# EAGLE board Nixie clock (EAGLE 9.4.2)
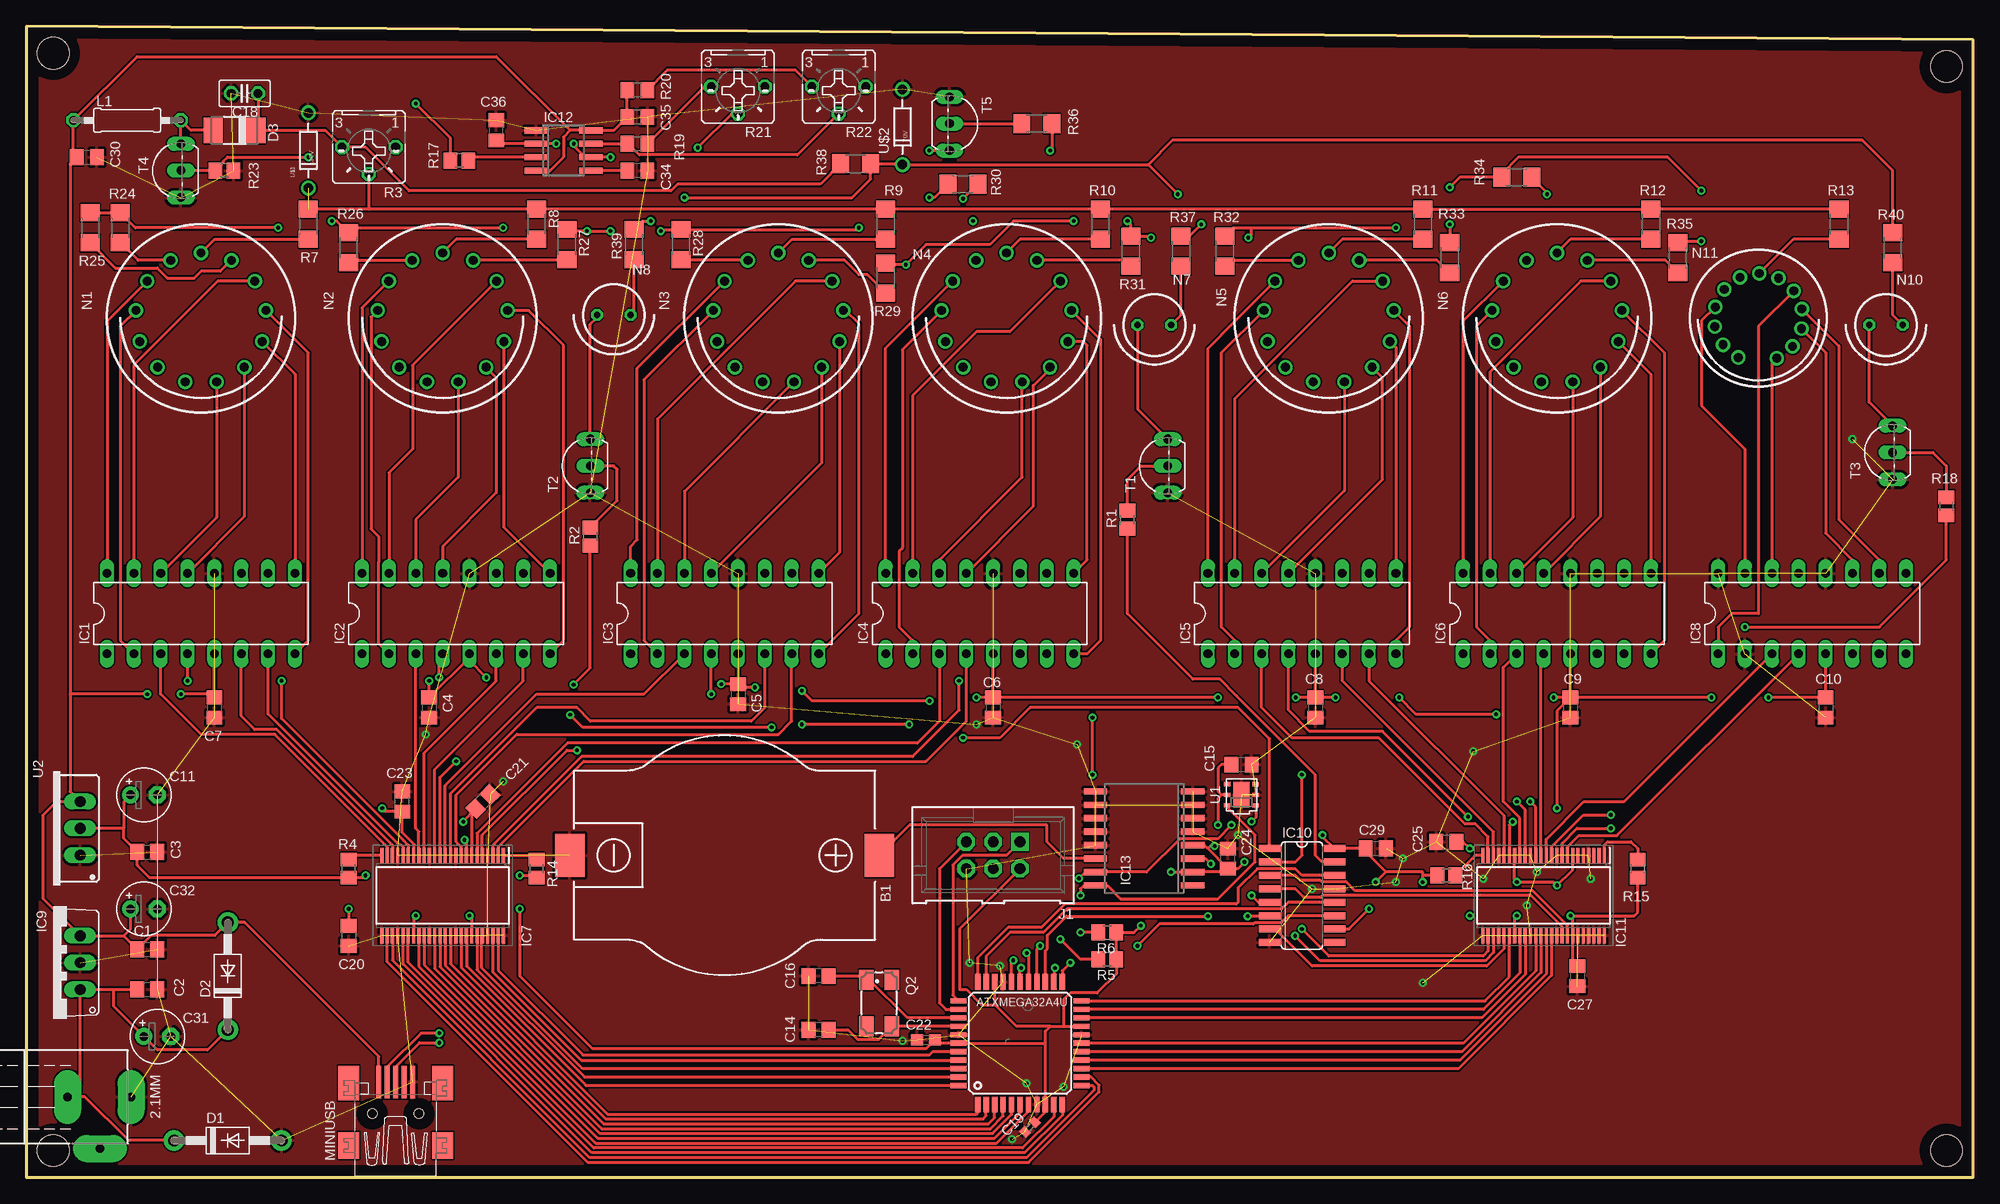
[diagram p0: board, top side]
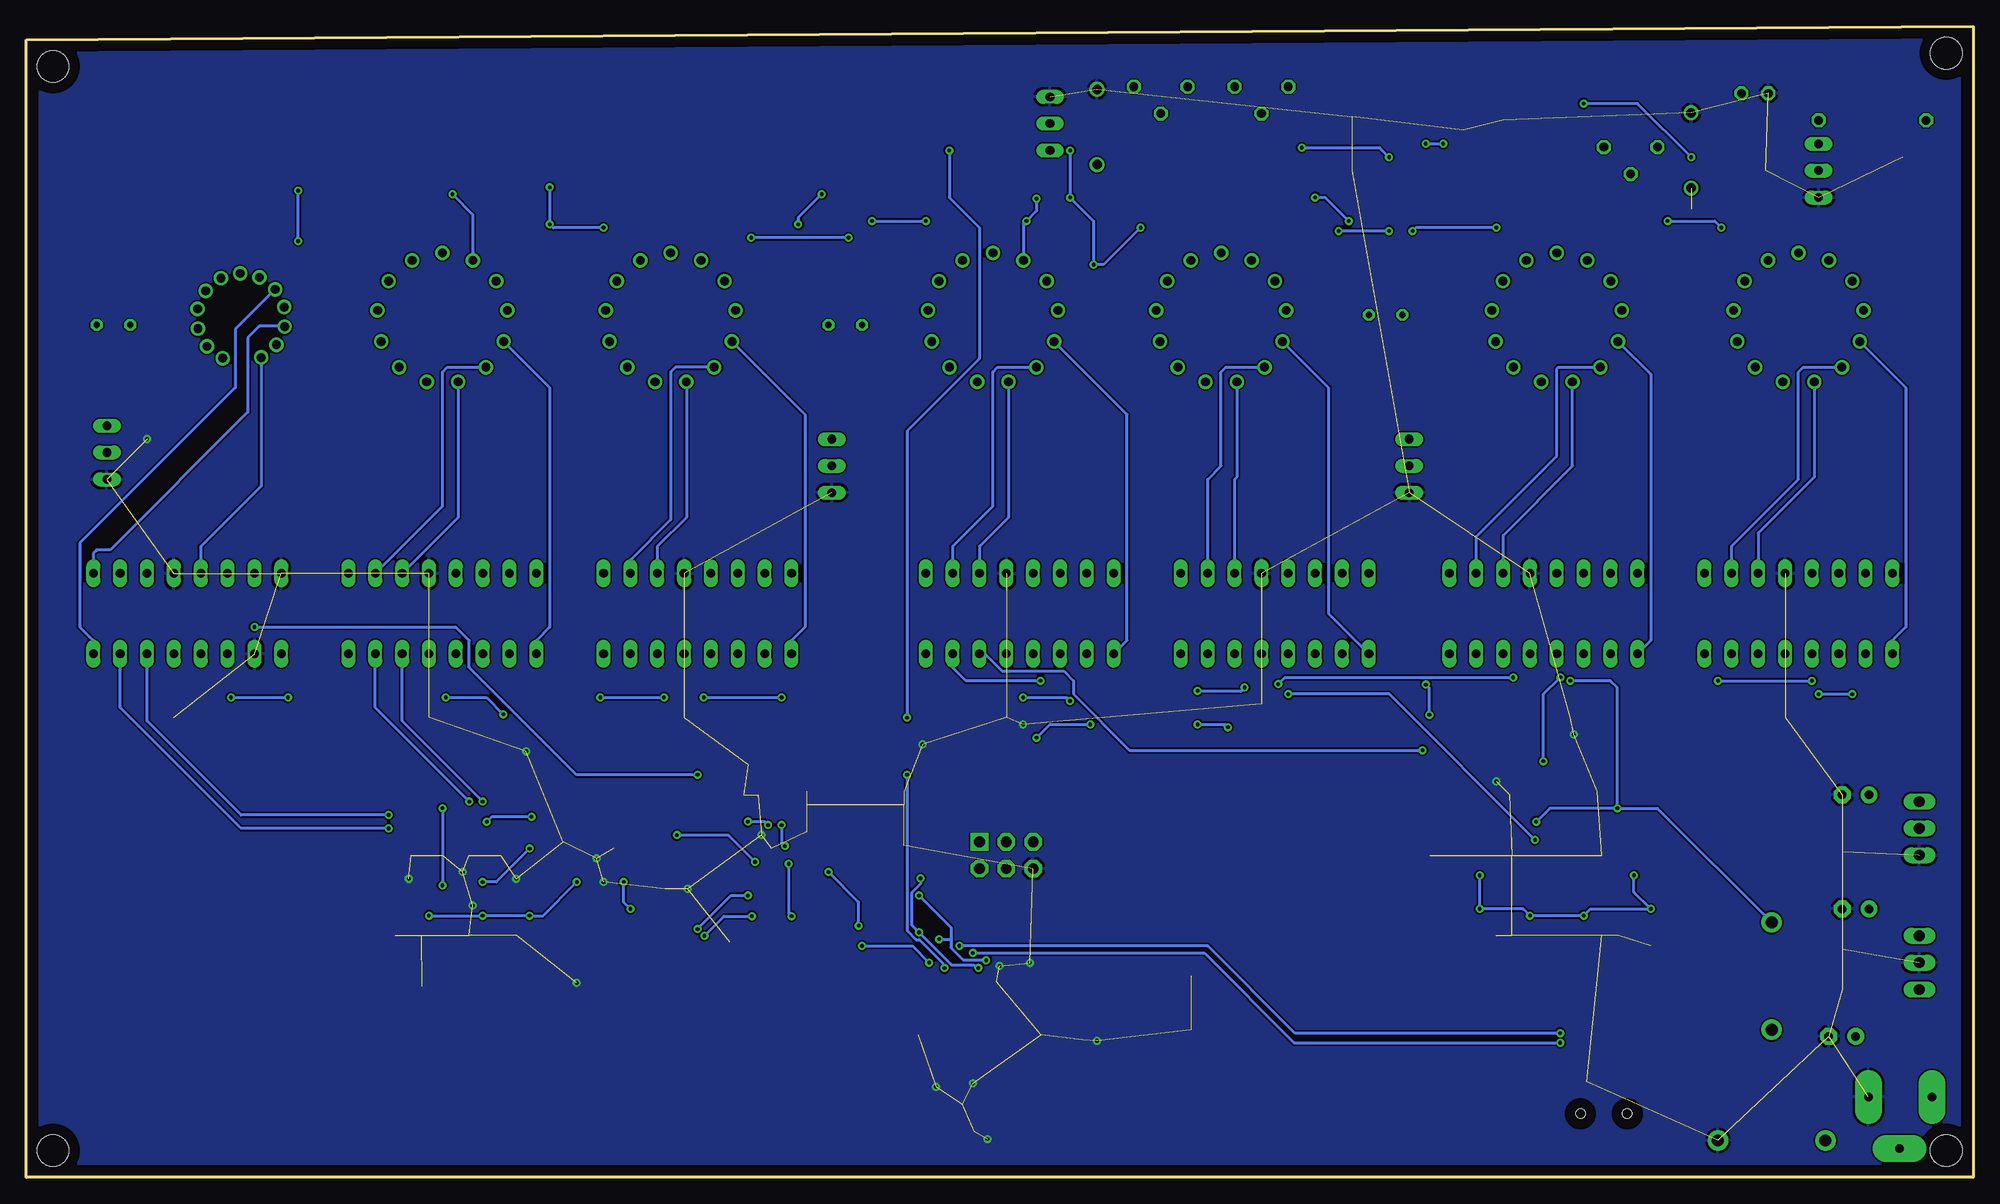
[diagram p1: board, bottom side, seen from below]

Size 184.13 x 108.89 mm. Coordinates in mm from the lower left corner, seen from the top.
Outline: 0,0 184.13,0 184.13,107.62 0,108.89 0,0
Copper layers (1*16): Top 0.035mm / dielectric 1.5mm / Bottom 0.035mm
Design rules "default": minimum track width 6mil, minimum drill 0.35mm, track to track 6mil, track to pad 6mil, pad to pad 6mil, via to via 6mil, smd to smd 6mil, copper to edge 40mil, drill to drill 6mil, minimum pad ring 10mil, minimum via ring 8mil, stop-mask expansion 4mil, vias tented up to drill 0mil, thermal gap 10mil
Holes 3 mm at 2.54,106.36 181.61,105.09 181.61,2.54 2.54,2.54

## Footprints (pad centres in the part's own frame; a part is rotated, then mirrored left to right if it is on the bottom)
DCSKTP = drill 0.813 pad 2.54 long: + -1.27,0.08; - -1.27,6.08; C 3.63,3.13
TQFP-44A-44 = smd 1.5 x 0.5: 1 -5.8,4; 2 -5.8,3.2; 3 -5.8,2.4; 4 -5.8,1.6; 5 -5.8,0.8; 6 -5.8,0; 7 -5.8,-0.8; 8 -5.8,-1.6; 9 -5.8,-2.4; 10 -5.8,-3.2; 11 -5.8,-4; 23 5.8,-4; 24 5.8,-3.2; 25 5.8,-2.4; 26 5.8,-1.6; 27 5.8,-0.8; 28 5.8,0; 29 5.8,0.8; 30 5.8,1.6; 31 5.8,2.4; 32 5.8,3.2; 33 5.8,4 | smd 0.5 x 1.5: 12 -4,-5.8; 13 -3.2,-5.8; 14 -2.4,-5.8; 15 -1.6,-5.8; 16 -0.8,-5.8; 17 0,-5.8; 18 0.8,-5.8; 19 1.6,-5.8; 20 2.4,-5.8; 21 3.2,-5.8; 22 4,-5.8; 34 4,5.8; 35 3.2,5.8; 36 2.4,5.8; 37 1.6,5.8; 38 0.8,5.8; 39 0,5.8; 40 -0.8,5.8; 41 -1.6,5.8; 42 -2.4,5.8; 43 -3.2,5.8; 44 -4,5.8
BHSD-2032-SM = smd 2.79 x 4.06: + -14.65,0; - 14.65,0
C0805 = smd 1.3 x 1.5: 1 -0.95,0; 2 0.95,0
E2,5-5 = drill 0.813 pad 1.6: + -1.27,0 | drill 0.813 pad 1.6 octagon: - 1.27,0
C025-025X050 = drill 0.813 octagon: 1 -1.27,0; 2 1.27,0
C0402 = smd 0.7 x 0.9: 1 -0.65,0; 2 0.65,0
C0603 = smd 1.1 x 1: 1 -0.85,0; 2 0.85,0
DO41-10 = drill 1.118 pad 1.93: A 5.08,0; C -5.08,0
DO-214AC = smd 1.8 x 2.4: A 2.025,0; C -2.025,0
DIL16 = drill 0.813 long: 1 -8.89,-3.81; 2 -6.35,-3.81; 3 -3.81,-3.81; 4 -1.27,-3.81; 5 1.27,-3.81; 6 3.81,-3.81; 7 6.35,-3.81; 8 8.89,-3.81; 9 8.89,3.81; 10 6.35,3.81; 11 3.81,3.81; 12 1.27,3.81; 13 -1.27,3.81; 14 -3.81,3.81; 15 -6.35,3.81; 16 -8.89,3.81
SOP50P810X120-48N = smd 1.475 x 0.3: 1 -3.788,5.75; 2 -3.788,5.25; 3 -3.788,4.75; 4 -3.788,4.25; 5 -3.788,3.75; 6 -3.788,3.25; 7 -3.788,2.75; 8 -3.788,2.25; 9 -3.788,1.75; 10 -3.788,1.25; 11 -3.788,0.75; 12 -3.788,0.25; 13 -3.788,-0.25; 14 -3.788,-0.75; 15 -3.788,-1.25; 16 -3.788,-1.75; 17 -3.788,-2.25; 18 -3.788,-2.75; 19 -3.788,-3.25; 20 -3.788,-3.75; 21 -3.788,-4.25; 22 -3.788,-4.75; 23 -3.788,-5.25; 24 -3.788,-5.75; 25 3.788,-5.75; 26 3.788,-5.25; 27 3.788,-4.75; 28 3.788,-4.25; 29 3.788,-3.75; 30 3.788,-3.25; 31 3.788,-2.75; 32 3.788,-2.25; 33 3.788,-1.75; 34 3.788,-1.25; 35 3.788,-0.75; 36 3.788,-0.25; 37 3.788,0.25; 38 3.788,0.75; 39 3.788,1.25; 40 3.788,1.75; 41 3.788,2.25; 42 3.788,2.75; 43 3.788,3.25; 44 3.788,3.75; 45 3.788,4.25; 46 3.788,4.75; 47 3.788,5.25; 48 3.788,5.75
TO220V = drill 1.016 long: 1 -2.54,-2.54; 2 0,-2.54; 3 2.54,-2.54
SO16 = smd 0.66 x 2.032: 1 -4.445,-3.073; 2 -3.175,-3.073; 3 -1.905,-3.073; 4 -0.635,-3.073; 5 0.635,-3.073; 6 1.905,-3.073; 7 3.175,-3.073; 8 4.445,-3.073; 9 4.445,3.073; 10 3.175,3.073; 11 1.905,3.073; 12 0.635,3.073; 13 -0.635,3.073; 14 -1.905,3.073; 15 -3.175,3.073; 16 -4.445,3.073
SO08 = smd 0.6 x 2.2: 1 -1.905,-2.6; 2 -0.635,-2.6; 3 0.635,-2.6; 4 1.905,-2.6; 5 1.905,2.6; 6 0.635,2.6; 7 -0.635,2.6; 8 -1.905,2.6
SO16W = smd 0.6 x 2.2: 1 -4.445,-4.6; 2 -3.175,-4.6; 3 -1.905,-4.6; 4 -0.635,-4.6; 5 0.635,-4.6; 6 1.905,-4.6; 7 3.175,-4.6; 8 4.445,-4.6; 9 4.445,4.6; 10 3.175,4.6; 11 1.905,4.6; 12 0.635,4.6; 13 -0.635,4.6; 14 -1.905,4.6; 15 -3.175,4.6; 16 -4.445,4.6
HDR-75869-131 = drill 1.016 pad 1.676 square: 1 -2.54,-1.27 | drill 1.016 pad 1.676 octagon: 2 -2.54,1.27; 3 0,-1.27; 4 0,1.27; 5 2.54,-1.27; 6 2.54,1.27
0207/10 = drill 0.813 octagon: 1 -5.08,0; 2 5.08,0
32005-301 = smd 3.1 x 0.5: 1 3,1.6; 2 3,0.8; 3 3,0; 4 3,-0.8; 5 3,-1.6 | smd 2.5 x 2: M1 -3,-4.45; M2 -3,4.45 | smd 3.3 x 2: M3 2.9,4.45; M4 2.9,-4.45 | hole 0.9: 0,2.2; 0,-2.2
IN-14 = drill 0.84: 0 5.094,-3.516; 1 -5.094,-3.516; 2 -6.145,-0.746; 3 -5.788,2.195; 4 -4.105,4.633; 5 -1.481,6.01; 6 1.481,6.01; 7 4.105,4.633; 8 5.788,2.195; 9 6.145,-0.746; A 0,-6.19; LHDP 2.877,-5.481; RHDP -2.877,-5.481
IN-3 = drill 0.6 octagon: A -1.587,0; K 1.587,0
IN-19 = drill 0.84: 2 1.733,-3.786; 3 3.222,-2.652; 4 4.072,-0.985; 5 4.114,0.886; 6 3.34,2.59; 7 1.903,3.79; 8 0.089,4.247; 9 -1.745,3.872; 10 -3.234,2.738; 11 -4.084,1.07; 12 -4.126,-0.801; 13 -3.352,-2.505; 14 -1.915,-3.704
CTS406 = smd 1.9 x 1.4: 1 -2.2,-1.2; 2 2.2,-1.2; 3 2.2,1.2; 4 -2.2,1.2
R0805 = smd 1.3 x 1.5: 1 -0.85,0; 2 0.85,0
B25P = drill 0.813 octagon: A -2.54,0; E 2.54,0; S 0,2.54
R1206 = smd 1.6 x 1.803: 1 -1.422,0; 2 1.422,0
R0805' = smd 1.3 x 1.5: 1 -0.95,0; 2 0.95,0
TO92-EBC = drill 0.813 long: B 0,-1.27; C 2.54,-1.27; E -2.54,-1.27
SHT21 = smd 0.4 x 0.6: GND 0,-1.35; NC 1,-1.35; NC2 1,1.35; SCL -1,1.35; SDA -1,-1.35; VCC 0,1.35 | smd 2.4 x 1.5: GND2 0,0
TO220-V = drill 1.016 long: 1 -2.54,-2.54; 2 0,-2.54; 3 2.54,-2.54
DIODE-ZENER = drill 0.9: P$1 -3.556,0; P$2 3.556,0

## Placement (x,y rotation side)
2.1MM  DC21P  [DCSKTP]  3.81,6.35 270 top
ATXMEGA32A4U  ATXMEGA32A4U-AU  [TQFP-44A-44]  93.98,12.7 90 top
B1  BHSD-2032-SM  [BHSD-2032-SM]  66.04,30.48 180 top
C1  100nF  [C0805]  11.43,21.59 0 top
C2  100nF  [C0805]  11.43,17.78 0 top
C3  100nF  [C0805]  11.43,30.8 0 top
C4  100nF  [C0805]  38.1,44.45 270 top
C5  100nF  [C0805]  67.31,45.72 270 top
C6  100nF  [C0805]  91.44,44.45 270 top
C7  100nF  [C0805]  17.78,44.45 270 top
C8  100nF  [C0805]  121.92,44.45 270 top
C9  100nF  [C0805]  146.05,44.45 270 top
C10  100nF  [C0805]  170.18,44.45 270 top
C11  10uF  [E2,5-5]  11.11,36.2 0 top
C14  22pF  [C0805]  74.93,13.97 180 top
C15  100nF  [C0805]  114.93,39.05 0 top
C16  22pF  [C0805]  74.93,19.05 180 top
C18  10nF  [C025-025X050]  20.64,102.55 180 top
C19  100nF  [C0402]  94.93,4.76 45 top
C20  100nF  [C0805]  30.48,22.86 270 top
C21  100nF  [C0805]  43.18,35.56 45 top
C22  100nF  [C0603]  85.09,13.02 0 top
C23  100nF  [C0805]  35.56,35.56 90 top
C24  100nF  [C0805]  113.67,30.16 90 top
C25  100nF  [C0805]  134.3,31.75 0 top
C27  100nF  [C0805]  146.69,19.05 270 top
C29  100nF  [C0805]  127.64,31.11 0 top
C30  100nF  [C0805]  5.71,96.52 0 top
C31  10uF  [E2,5-5]  12.38,13.33 0 top
C32  10uF  [E2,5-5]  11.11,25.4 0 top
C34  10nF  [C0805]  57.78,95.25 180 top
C35  100nF  [C0805]  57.78,100.33 0 top
C36  1.3nF  [C0805]  44.45,99.06 90 top
D1  1N4004  [DO41-10]  19.05,3.49 0 top
D2  1N4004  [DO41-10]  19.05,19.05 90 top
D3  [DO-214AC]  19.68,99.06 180 top
IC1  74141N  [DIL16]  16.51,53.34 0 top
IC2  74141N  [DIL16]  40.64,53.34 0 top
IC3  74141N  [DIL16]  66.04,53.34 0 top
IC4  74141N  [DIL16]  90.17,53.34 0 top
IC5  74141N  [DIL16]  120.65,53.34 0 top
IC6  74141N  [DIL16]  144.78,53.34 0 top
IC7  SN74ALVC164245DGGR  [SOP50P810X120-48N]  39.37,26.67 270 top
IC8  74141N  [DIL16]  168.91,53.34 0 top
IC9  7805TV  [TO220V]  2.54,20.32 90 top
IC10  74HC595D  [SO16]  120.65,26.67 270 top
IC11  SN74ALVC164245DGGR  [SOP50P810X120-48N]  143.51,26.67 270 top
IC12  LM555D  [SO08]  50.8,97.16 270 top
IC13  DS3231/SO  [SO16W]  105.73,32.07 90 top
J1  XMEGA-PDI-675869-131  [HDR-75869-131]  91.44,30.48 180 top
L1  [0207/10]  9.53,100.01 180 top
MINIUSB  MINI-USB-32005-301  [32005-301]  34.92,6.03 90 top
N1  IN-14  [IN-14]  16.51,81.28 180 top
N2  IN-14  [IN-14]  39.37,81.28 180 top
N3  IN-14  [IN-14]  71.12,81.28 180 top
N4  IN-14  [IN-14]  92.71,81.28 180 top
N5  IN-14  [IN-14]  123.19,81.28 180 top
N6  IN-14  [IN-14]  144.78,81.28 180 top
N7  IN-3  [IN-3]  106.68,80.64 180 top
N8  IN-3  [IN-3]  55.56,81.6 180 top
N10  IN-3  [IN-3]  175.9,80.64 180 top
N11  IN-19A  [IN-19]  163.83,81.28 0 top
Q2  [CTS406]  80.64,16.51 270 top
R1  3.3K  [R0805]  104.14,62.23 90 top
R2  3.3K  [R0805]  53.34,60.64 90 top
R3  10K  [B25P]  32.39,97.47 180 top
R4  10k  [R0805]  30.48,29.21 90 top
R5  10k  [R0805]  102.23,20.64 180 top
R6  10k  [R0805]  102.23,23.18 180 top
R7  60K  [R1206]  26.67,90.17 270 top
R8  60K  [R1206]  48.26,90.17 270 top
R9  60K  [R1206]  81.28,90.17 270 top
R10  60K  [R1206]  101.6,90.17 270 top
R11  60K  [R1206]  132.08,90.17 270 top
R12  60K  [R1206]  153.67,90.17 270 top
R13  60K  [R1206]  171.45,90.17 270 top
R14  10k  [R0805]  48.26,29.21 270 top
R15  10k  [R0805]  152.4,29.21 270 top
R16  10k  [R0805]  134.3,28.57 0 top
R17  500  [R0805]  40.96,96.2 0 top
R18  3.3K  [R0805]  181.61,63.5 90 top
R19  30K  [R0805']  57.78,97.79 180 top
R20  1K  [R0805']  57.78,102.87 180 top
R21  10K  [B25P]  67.31,103.19 180 top
R22  10K  [B25P]  76.83,103.19 180 top
R23  10k  [R0805]  18.73,95.25 180 top
R24  600K  [R1206]  8.89,89.85 270 top
R25  600K  [R1206]  6.03,89.85 270 top
R26  600K  [R1206]  30.48,87.95 270 top
R27  600K  [R1206]  51.12,88.27 270 top
R28  600K  [R1206]  61.91,88.27 270 top
R29  600K  [R1206]  81.28,85.09 270 top
R30  600K  [R1206]  88.58,93.98 0 top
R31  600K  [R1206]  104.46,87.63 270 top
R32  100K  [R1206]  113.35,87.63 270 top
R33  100K  [R1206]  134.62,86.99 270 top
R34  100K  [R1206]  140.97,94.61 0 top
R35  100K  [R1206]  156.21,86.99 270 top
R36  3.3K  [R1206]  95.57,99.69 0 top
R37  180K  [R1206]  109.22,87.63 90 top
R38  85K  [R1206]  78.42,95.88 0 top
R39  180K  [R1206]  57.47,88.27 90 top
R40  180K  [R1206]  176.53,87.95 90 top
T1  [TO92-EBC]  106.68,67.31 90 top
T2  [TO92-EBC]  52.07,67.31 90 top
T3  [TO92-EBC]  175.26,68.58 90 top
T4  [TO92-EBC]  13.33,95.25 90 top
T5  [TO92-EBC]  88.58,99.69 270 top
U1  SHT21  [SHT21]  114.93,36.2 90 top
U2  LD1117VXX-V  [TO220-V]  2.54,33.02 90 top
U$1  180V  [DIODE-ZENER]  26.67,97.16 90 top
U$2  70V  [DIODE-ZENER]  82.87,99.38 90 top

## Library data of the parts
2.1MM = dcsocket
ATXMEGA32A4U J1 = atmel-xmega
B1 = battery
C1-C10 C14-C16 C18-C25 C27 C29 C30 C34-C36 = rcl; SPICEPREFIX: C
C11 C31 C32 D1 D2 = adafruit
D3 = diode
IC1-IC6 IC8 IC10 = 74xx-eu
IC7 IC11 = SN74ALVC164245DGGR; DESCRIPTION: 16-Bit 2.5-V to 3.3-V/3.3-V To 5-V Level Shifting Transceiver With 3-State Outputs; HEIGHT: 1.2mm; MANUFACTURER_NAME: Texas Instruments; MANUFACTURER_PART_NUMBER: SN74ALVC164245DGGR; MOUSER_PART_NUMBER: 595-SNALVC164245DGGR; MOUSER_PRICE-STOCK: https://www.mouser.com/Search/Refine.aspx?Keyword=595-SNALVC164245DGGR
IC9 IC12 = linear
IC13 = DS3231; AVAILABILITY: Unavailable; MF: Maxim Integrated; MP: DS3231; PACKAGE: SOIC-16 Maxim Integrated; PRICE: None
L1 = eagle-ltspice; SPICEMODEL: NONE; SPICEPREFIX: L
MINIUSB = con-cypressindustries; OC_FARNELL: unknown; OC_NEWARK: unknown
N1-N8 N10 N11 = russian-nixies
Q2 = adafruit; OC_FARNELL: unknown; OC_NEWARK: unknown
R1 R2 R4-R18 R23-R40 = resistor
R3 R21 R22 = pot
R19 R20 = rcl; SPICEPREFIX: R
T1-T5 = transistor
U1 = chips; NEWARK: 20T1172
U2 = v-reg
U$1 U$2 = SparkFun

## Nets
3V3: ATXMEGA32A4U.9 ATXMEGA32A4U.19 ATXMEGA32A4U.31 ATXMEGA32A4U.39 C3.1 C11.+ C15.1 C19.2 C20.1 C22.2 C24.1 C27.1 C29.1 IC7.31 IC7.42 IC10.10 IC10.16 IC11.31 IC11.42 IC13.2 IC13.4 J1.2 R4.1 R5.1 R6.1 R14.2 R15.2 R16.1 U1.VCC U2.2
12V: 2.1MM.+ C2.1 C31.+ D1.C D2.C IC9.1
595SCK: ATXMEGA32A4U.23 IC10.11
A0: ATXMEGA32A4U.14 IC11.38
A1: ATXMEGA32A4U.15 IC11.37
A2: ATXMEGA32A4U.16 IC11.36
A3: ATXMEGA32A4U.17 IC11.35
A4: ATXMEGA32A4U.20 IC11.33
A5: ATXMEGA32A4U.21 IC11.32
A6: ATXMEGA32A4U.22 IC11.30
A8: ATXMEGA32A4U.24 R36.2
ANODE: R3.S R7.1 R8.1 R9.1 R10.1 R11.1 R12.1 R13.1 U$1.P$1
B0: ATXMEGA32A4U.40 IC7.47
B1: ATXMEGA32A4U.41 IC7.46
B2: ATXMEGA32A4U.42 IC7.44
B3: ATXMEGA32A4U.43 IC7.43
B4: ATXMEGA32A4U.44 IC7.41
B5: ATXMEGA32A4U.1 IC7.40
B6: ATXMEGA32A4U.2 IC7.38
B7: ATXMEGA32A4U.3 IC7.37
B8: ATXMEGA32A4U.4 IC7.36
B9: ATXMEGA32A4U.5 IC7.35
B10: ATXMEGA32A4U.6 IC7.33
B11: ATXMEGA32A4U.7 IC7.32
B12: ATXMEGA32A4U.10 IC7.30
B13: ATXMEGA32A4U.11 IC7.29
B14: ATXMEGA32A4U.12 IC7.27
B15: ATXMEGA32A4U.13 IC7.26
C0: IC10.4 IC11.40
C1: IC10.3 IC11.41
C2: IC10.5 IC11.26
C3: IC10.6 IC11.27
C4: IC10.7 IC11.29
D+: ATXMEGA32A4U.27 MINIUSB.3
D-: ATXMEGA32A4U.26 MINIUSB.2
DATA: ATXMEGA32A4U.33 IC10.14
DS3231PULSE: ATXMEGA32A4U.25 IC13.3
GND: 2.1MM.- ATXMEGA32A4U.8 ATXMEGA32A4U.18 ATXMEGA32A4U.30 ATXMEGA32A4U.38 B1.- C1.2 C2.2 C3.2 C4.2 C5.2 C6.2 C7.2 C8.2 C9.2 C10.2 C11.- C14.2 C15.2 C16.2 C18.2 C19.1 C20.2 C21.2 C22.1 C23.2 C24.2 C25.1 C27.2 C29.2 C30.2 C31.- C32.- C34.1 C35.2 C36.2 D1.A IC1.12 IC2.12 IC3.12 IC4.12 IC5.12 IC6.12 IC7.4 IC7.10 IC7.15 IC7.21 IC7.25 IC7.28 IC7.34 IC7.39 IC7.45 IC7.48 IC8.2 IC8.12 IC8.16 IC9.2 IC10.8 IC10.13 IC11.4 IC11.10 IC11.15 IC11.21 IC11.25 IC11.28 IC11.34 IC11.39 IC11.43 IC11.44 IC11.45 IC11.46 IC11.47 IC11.48 IC12.1 IC13.5 IC13.6 IC13.7 IC13.8 IC13.9 IC13.10 IC13.11 IC13.12 IC13.13 J1.6 MINIUSB.5 R23.1 T1.E T2.E T3.E T4.E T5.E U1.GND U1.GND2 U2.1 U$1.P$2 U$2.P$2
HVOUT: C18.1 D3.C R3.E R38.1
IN3: R37.2 R38.2 R39.2 R40.2 U$2.P$1
LATCH: ATXMEGA32A4U.32 IC10.12
N1P0: IC1.16 N1.0
N2P0: IC2.16 N2.0
N3P0: IC3.16 N3.0
N4P0: IC4.16 N4.0
N5P0: IC5.16 N5.0
N6P0: IC6.16 N6.0
N$1: IC1.15 N1.1
N$2: IC1.8 N1.2
N$3: IC1.9 N1.3
N$4: IC1.13 N1.4
N$5: IC1.14 N1.5
N$6: IC1.11 N1.6
N$7: IC1.10 N1.7
N$8: IC1.1 N1.8
N$9: IC1.2 N1.9
N$10: N11.8 R13.2
N$11: N6.A R12.2
N$12: N5.A R11.2
N$13: N8.K T2.C
N$14: N7.K T1.C
N$15: IC1.3 IC7.23
N$16: IC1.6 IC7.22
N$17: IC1.7 IC7.20
N$18: IC1.4 IC7.19
N$19: IC2.3 IC7.17
N$20: N1.LHDP R24.2
N$21: R1.2 T1.B
N$22: N1.RHDP R25.2
N$23: R20.1 R22.E
N$24: R2.2 T2.B
N$25: IC2.2 N2.9
N$26: IC2.1 N2.8
N$27: IC2.10 N2.7
N$28: IC2.11 N2.6
N$29: IC2.14 N2.5
N$30: IC2.13 N2.4
N$31: IC2.9 N2.3
N$32: IC2.8 N2.2
N$33: IC2.15 N2.1
N$34: D3.A L1.1 T4.C
N$35: N4.A R10.2
N$36: IC3.2 N3.9
N$37: IC3.1 N3.8
N$38: IC3.10 N3.7
N$39: IC3.11 N3.6
N$40: IC3.14 N3.5
N$41: IC3.13 N3.4
N$42: IC3.9 N3.3
N$43: IC3.8 N3.2
N$44: IC3.15 N3.1
N$45: N3.A R9.2
N$46: IC4.15 N4.1
N$47: IC4.8 N4.2
N$48: IC4.9 N4.3
N$49: IC4.13 N4.4
N$50: IC4.14 N4.5
N$51: IC4.11 N4.6
N$52: IC4.10 N4.7
N$53: IC4.1 N4.8
N$54: IC4.2 N4.9
N$55: N2.A R8.2
N$56: N1.A R7.2
N$57: IC2.6 IC7.16
N$58: IC5.2 N5.9
N$59: IC5.1 N5.8
N$60: IC5.10 N5.7
N$61: IC5.11 N5.6
N$62: IC5.14 N5.5
N$63: IC5.13 N5.4
N$64: IC5.9 N5.3
N$65: IC5.8 N5.2
N$66: IC5.15 N5.1
N$67: IC2.7 IC7.14
N$68: IC6.15 N6.1
N$69: IC6.8 N6.2
N$70: IC6.9 N6.3
N$71: IC6.13 N6.4
N$72: IC6.14 N6.5
N$73: IC6.11 N6.6
N$74: IC6.10 N6.7
N$75: IC6.1 N6.8
N$76: IC6.2 N6.9
N$77: IC11.1 R15.1
N$78: IC11.24 R16.2
N$79: IC8.15 N11.11
N$80: IC8.8 N11.10
N$81: IC8.9 N11.12
N$82: IC8.13 N11.14
N$83: IC8.14 N11.2
N$84: IC8.11 N11.4
N$85: IC8.10 N11.5
N$86: IC8.1 N11.6
N$87: IC3.3 IC7.12
N$88: IC3.6 IC7.11
N$89: IC2.4 IC7.13
N$90: IC3.7 IC7.9
N$91: IC3.4 IC7.8
N$92: IC5.3 IC11.23
N$93: IC4.4 IC7.2
N$94: IC4.7 IC7.3
N$95: IC4.6 IC7.5
N$96: IC4.3 IC7.6
N$97: IC5.6 IC11.22
N$98: IC5.7 IC11.20
N$99: IC5.4 IC11.19
N$100: IC6.3 IC11.17
N$101: IC6.6 IC11.16
N$102: IC6.7 IC11.14
N$103: R19.1 R21.E
N$104: N2.LHDP R26.2
N$105: IC6.4 IC11.13
N$106: IC8.3 IC11.12
N$107: IC8.6 IC11.11
N$108: IC8.7 IC11.9
N$109: IC8.4 IC11.8
N$110: N2.RHDP R27.2
N$111: N3.LHDP R28.2
N$112: N3.RHDP R29.2
N$113: B1.+ IC13.14
N$114: N4.LHDP R30.2
N$115: N4.RHDP R31.2
N$116: N5.LHDP R32.2
N$117: N5.RHDP R33.2
N$118: N6.RHDP R35.2
N$119: N6.LHDP R34.2
N$120: R36.1 T5.B
N$122: IC7.24 R4.2
N$123: IC7.1 R14.1
N$124: N7.A R37.1
N$126: N10.A R40.1
N$128: N8.A R39.1
N$136: ATXMEGA32A4U.36 C16.1 Q2.1
N$138: ATXMEGA32A4U.37 C14.1 Q2.3
N$139: R18.2 T3.B
N$140: N10.K T3.C
N$142: IC12.7 R19.2 R22.S
N$144: C36.1 IC12.2 IC12.6 R21.S
N$145: R17.1 R23.2 T4.B
N$147: C34.2 IC12.5
NIXIEAM/PM: IC10.2 R18.1
NIXIECOLON1: IC10.15 R1.1
NIXIECOLON2: IC10.1 R2.1
NIXIEDP: R24.1 R25.1 R26.1 R27.1 R28.1 R29.1 R30.1 R31.1 R32.1 R33.1 R34.1 R35.1 T5.C
PDICLK: ATXMEGA32A4U.35 J1.5
PDIDATA: ATXMEGA32A4U.34 J1.1
PWM: IC12.3 R17.2
SCL: ATXMEGA32A4U.29 IC13.16 R5.2 U1.SCL
SDA: ATXMEGA32A4U.28 IC13.15 R6.2 U1.SDA
VCC: C1.1 C4.1 C5.1 C6.1 C7.1 C8.1 C9.1 C10.1 C21.1 C23.1 C25.2 C30.1 C32.+ C35.1 D2.A IC1.5 IC2.5 IC3.5 IC4.5 IC5.5 IC6.5 IC7.7 IC7.18 IC8.5 IC9.3 IC11.7 IC11.18 IC12.4 IC12.8 L1.2 MINIUSB.1 R20.2 U2.3

## Tracks (layer width: path | path; a pad name or v marks a point on that pad's centre or on a via)
3V3  (via drill 0.35)
  Top 0.305: IC7.42 42.12,24.55 v41.91,24.77 | C19.2 96.38,6.21 ATXMEGA32A4U.9 96.38,12.7 | 9.21,33.02 U2.2 | 126.36,31.11 IC10.16 122.6,32.23 v122.6,32.38 | 126.36,31.11 C29.1 | 9.21,33.02 9.21,32.07 C3.1 10.48,29.52 11.64,28.36 R4.1 31.85,28.36 v32.07,28.57 | v36.83,24.77 36.62,24.55 IC7.31 | v30.48,25.4 C20.1 | v46.67,28.57 48.05,28.57 R14.2 | C27.1 146.26,20.43 IC11.42 146.26,24.55 v146.05,24.77 152.08,24.77 152.4,25.08 R15.2 | v140.97,24.77 140.76,24.55 IC11.31 | R16.1 132.08,28.57 | 128.59,28.89 132.08,28.89 132.08,28.57 | 128.59,28.89 126.36,31.11 | IC10.10 125.09,23.5 v127,25.4 | v132.08,27.94 132.08,28.57 | 96.38,12.7 96.38,13.83 96.85,14.3 | 96.85,14.3 98.11,14.3 | 98.11,14.3 ATXMEGA32A4U.19 | ATXMEGA32A4U.31 91.58,16.37 91.6,16.35 | 91.6,16.35 93.65,14.3 96.85,14.3 | 96.38,12.7 ATXMEGA32A4U.39 86.26,12.7 C22.2 85.13,12.21 53.51,12.21 46.67,19.05 v46.67,25.4 | v127.64,27.94 128.59,28.89 | C24.1 113.34,28.89 IC13.2 v108.27,28.89 | U1.VCC 113.03,36.2 | C15.1 113.03,39.05 112.71,38.74 112.71,36.51 113.03,36.2 | C24.1 111.76,31.12 | 111.76,31.12 111.45,31.43 IC13.4 | v105.41,23.81 104.77,23.18 R6.1 R5.1 103.08,19.27 101.28,17.46 98.74,17.46 98.11,16.83 98.11,14.3 | v115.2,29.84 114.57,29.21 C24.1 | 113.03,36.2 112.71,35.88 v112.71,33.34 | v112.38,31.35 112,31.35 111.76,31.12 | C11.+ 9.21,35.56 9.21,33.02 | J1.2 88.27,23.5 88.27,17.78 88.9,17.78 90.33,16.35 91.6,16.35
  Bottom 0.305: v46.67,28.57 v46.67,25.4 42.55,25.4 v41.91,24.77 v36.83,24.77 36.19,25.4 v30.48,25.4 32.07,26.99 v32.07,28.57 | v127,25.4 127.64,26.04 v127.64,27.94 | v146.05,24.77 v140.97,24.77 v136.53,24.77 135.26,24.77 v132.08,27.94 | v105.41,23.81 105.41,26.04 v108.27,28.89 | v122.6,32.38 117.74,32.38 v115.2,29.84 | v112.71,33.34 112.71,31.68 v112.38,31.35
12V
  Top 0.305: 8.25,17.78 IC9.1 5.08,8.81 2.1MM.+ 5.54,7.62 9.67,3.49 D1.C | 8.25,17.78 C2.1 | D2.C 17.14,12.06 12.38,12.06 C31.+ 8.25,16.19 8.25,17.78
595SCK  (via drill 0.35)
  Top 0.305: IC10.11 119.35,24.77 118.72,24.13 116.52,24.13 116.2,24.13 116.05,23.97 107.16,23.97 v105.09,21.91 | v98.74,20.32 97.98,19.56 ATXMEGA32A4U.23
  Bottom 0.305: v105.09,21.91 100.33,21.91 v98.74,20.32
A0
  Top 0.305: ATXMEGA32A4U.14 135.45,10.3 144.26,19.11 IC11.38
A1
  Top 0.305: ATXMEGA32A4U.15 135.61,11.1 135.75,11.25 143.76,19.25 IC11.37
A2
  Top 0.305: ATXMEGA32A4U.16 135.76,11.9 143.26,19.4 IC11.36
A3
  Top 0.305: ATXMEGA32A4U.17 135.91,12.7 142.76,19.55 IC11.35
A4
  Top 0.305: ATXMEGA32A4U.20 137.67,15.1 141.76,19.19 IC11.33
A5
  Top 0.305: IC11.32 141.26,19.34 137.82,15.9 ATXMEGA32A4U.21
A6
  Top 0.305: ATXMEGA32A4U.22 137.97,16.7 140.26,18.99 IC11.30
A8  (via drill 0.35)
  Top 0.305: R36.2 96.99,97.31 v96.84,97.16 | v97.3,19.81 97.18,19.7 ATXMEGA32A4U.24 | v100.83,38.1 v100.83,43.5
  Bottom 0.305: v96.84,97.16 96.84,92.71 93.98,89.85 93.98,77.47 100.83,70.61 v100.83,43.5 | v97.3,19.81 97.3,20.13 99.66,22.49 99.98,22.49 100.83,23.35 v100.83,38.1
ANODE  (1 unrouted)
  Top 0.305: R13.1 R12.1 R11.1 R10.1 R9.1 R8.1 32.39,91.59 | 32.39,91.59 R7.1 | R3.S 32.39,91.59
B0
  Top 0.305: ATXMEGA32A4U.40 85.72,11.9 85.41,11.58 52.63,11.58 44.62,19.6 IC7.47
B1
  Top 0.305: 44.12,21.3 IC7.46 44.12,19.45 52.47,11.1 ATXMEGA32A4U.41
B2
  Top 0.305: IC7.44 43.08,22.84 43.08,19.85 52.62,10.3 ATXMEGA32A4U.42
B3
  Top 0.305: IC7.43 42.62,19.66 52.78,9.5 ATXMEGA32A4U.43
B4
  Top 0.305: IC7.41 41.62,20.01 52.93,8.7 ATXMEGA32A4U.44
B5
  Top 0.305: IC7.40 41.12,19.86 54.99,6 89.85,6 89.98,6.12 ATXMEGA32A4U.1
B6
  Top 0.305: IC7.38 40.12,20.22 54.8,5.54 90.49,5.54 90.78,5.83 ATXMEGA32A4U.2
B7
  Top 0.305: IC7.37 39.62,20.07 54.61,5.08 91.01,5.08 91.58,5.65 ATXMEGA32A4U.3
B8
  Top 0.305: IC7.36 39.12,19.92 54.42,4.62 91.2,4.62 92.38,5.81 ATXMEGA32A4U.4
B9
  Top 0.305: IC7.35 38.62,19.78 54.23,4.17 91.39,4.17 93.18,5.96 ATXMEGA32A4U.5
B10
  Top 0.305: IC7.33 37.62,20.13 54.04,3.71 91.58,3.71 93.98,6.12 ATXMEGA32A4U.6
B11
  Top 0.305: IC7.32 37.12,19.98 53.85,3.25 91.77,3.25 94.78,6.27 ATXMEGA32A4U.7
B12
  Top 0.305: IC7.30 36.12,20.34 53.66,2.8 94.24,2.8 97.18,5.74 ATXMEGA32A4U.10
B13
  Top 0.305: IC7.29 35.62,20.19 53.47,2.34 94.43,2.34 97.98,5.89 ATXMEGA32A4U.11
B14
  Top 0.305: IC7.27 34.62,20.54 53.28,1.88 94.61,1.88 100.96,8.23 100.96,8.57 100.84,8.7 ATXMEGA32A4U.12
B15
  Top 0.305: IC7.26 34.12,20.4 53.09,1.43 94.8,1.43 101.46,8.08 101.46,8.72 100.68,9.5 ATXMEGA32A4U.13
C0
  Top 0.305: IC10.4 120.02,27.3 120.83,26.49 122.4,26.49 122.58,26.67 142.29,26.67 145.26,23.7 IC11.40
C1
  Top 0.305: IC10.3 120.02,28.57 120.49,28.1 122.4,28.1 122.55,27.94 124.87,27.94 125.68,27.13 142.48,27.13 145.76,23.85 IC11.41
C2  (via drill 0.35)
  Top 0.305: IC11.26 138.26,21.42 137.8,20.95 123.19,20.95 v120.65,23.5 | v115.89,26.67 116.52,26.04 IC10.5
  Bottom 0.305: v120.65,23.5 117.48,26.67 v115.89,26.67
C3  (via drill 0.35)
  Top 0.305: IC11.27 138.76,21.27 137.98,20.5 122.36,20.5 v120.01,22.85 | v115.51,24.72 115.56,24.77 IC10.6
  Bottom 0.305: v120.01,22.85 118.14,24.72 v115.51,24.72
C4
  Top 0.305: IC11.29 139.76,21.63 138.14,20 121.6,20 121.13,20.48 118.11,23.5 IC10.7
D+  (via drill 0.35)
  Top 0.305: MINIUSB.3 34.92,10.48 37.19,12.74 v39.05,12.74 | v94.61,21.22 94.78,21.06 ATXMEGA32A4U.27
  Bottom 0.305: v94.61,21.22 72.71,21.22 64.23,12.74 v39.05,12.74
D-  (via drill 0.35)
  Top 0.305: v39.05,13.65 37.31,13.65 34.12,10.46 MINIUSB.2 | ATXMEGA32A4U.26 95.58,21.6 v95.88,21.91
  Bottom 0.305: v95.88,21.91 72.39,21.91 64.13,13.65 v39.05,13.65
DATA
  Top 0.305: IC10.14 120.66,28.57 120.03,29.21 116.43,29.21 114.62,27.39 114.62,26.04 114.44,25.86 98.22,25.86 96.01,23.64 92.84,23.64 89.98,20.78 ATXMEGA32A4U.33
DS3231PULSE  (via drill 0.35)
  Top 0.305: IC13.3 111.52,30.16 v112.03,29.66 | v111.76,24.72 98.38,24.72 96.57,22.91 96.57,21.62 96.38,21.44 ATXMEGA32A4U.25
  Bottom 0.305: v112.03,29.66 112.03,24.99 v111.76,24.72
GND  (via drill 0.35)  (116 unrouted)
  other vias: 93.22,3.62 132.08,18.41 129.54,27.94 121.6,27.3 94.61,8.89 99.38,40.96 89.85,42.86 89.22,20.32 82.87,12.93 37.78,41.91 98.11,8.57 114.62,32.38 45.08,37.47 92.08,20 130.18,30.16 137.8,28.26 142.88,28.89 147.96,28.26 172.72,69.85 141.92,25.72 136.84,40.32
  pour Top: -2.54,112.71 187.96,112.71 187.96,-5.08 -2.54,-5.08
  pour Bottom: -6.35,115.89 -6.35,-7.62 190.5,-7.62 190.5,115.89
HVOUT
  Top 0.305: R38.1 75.1,93.98 61.59,93.98 60.96,93.34 36.19,93.34 32.07,97.47 R3.E 28.26,99.06 D3.C 21.91,99.26 C18.1
IN3  (via drill 0.35)
  Top 0.305: R39.2 58.27,90.49 v59.05,90.49 | v62.23,92.71 78.1,92.71 79.84,94.45 R38.2 82.8,95.88 U$2.P$1 106.11,95.82 | v108.9,93.03 106.11,95.82 | v111.12,90.17 110.01,89.05 R37.2 | R40.2 176.53,95.25 173.67,98.11 108.39,98.11 106.11,95.82
  Bottom 0.305: v59.05,90.49 61.28,92.71 v62.23,92.71 | v108.9,93.03 111.12,90.8 v111.12,90.17
LATCH
  Top 0.305: IC10.12 119.35,26.04 118.72,25.4 98.41,25.4 96.2,23.18 93.03,23.18 90.78,20.93 ATXMEGA32A4U.32
N1P0
  Top 0.305: N1.0 7.62,81 IC1.16
N2P0
  Top 0.305: N2.0 31.75,82.27 IC2.16
N3P0
  Top 0.305: IC3.16 57.15,59.69 57.78,60.33 57.78,76.55 N3.0
N4P0
  Top 0.305: IC4.16 81.28,78.46 N4.0
N5P0
  Top 0.305: N5.0 113.03,79.73 113.03,79.69 111.76,78.42 IC5.16
N6P0
  Top 0.305: N6.0 135.89,81 IC6.16
N$1
  Top 0.305: N1.1 18.1,84.8 10.16,76.86 IC1.15
N$2
  Top 0.305: IC1.8 26.67,50.8 26.67,78.01 N1.2
N$3
  Top 0.305: N1.3 25.4,75.98 IC1.9
N$4
  Top 0.305: N1.4 20.61,62.53 IC1.13
N$5
  Top 0.305: N1.5 17.99,62.44 IC1.14
N$6
  Bottom 0.305: N1.6 15.03,66.25 20.32,60.96 IC1.11
N$7
  Bottom 0.305: IC1.10 22.86,59.69 16.51,66.04 16.51,76.2 16.06,76.65 N1.7
N$8
  Bottom 0.305: N1.8 6.35,74.71 6.35,52.07 7.62,50.8 IC1.1
N$9
  Top 0.305: N1.9 8.89,80.55 8.89,50.8 IC1.2
N$10
  Top 0.305: R13.2 167.14,88.75 N11.8
N$11
  Top 0.305: R12.2 146.06,88.75 N6.A
N$12
  Top 0.305: R11.2 124.47,88.75 N5.A
N$13
  Top 0.305: N8.K 53.91,81.29 53.34,80.72 T2.C
N$14
  Top 0.305: N7.K 105.09,72.71 T1.C
N$15
  Top 0.305: IC1.3 12.7,45.72 16.51,41.91 23.49,41.91 33.97,31.43 34.08,31.32 34.12,31.28 IC7.23
N$16
  Top 0.305: IC1.6 20.32,43.64 21.59,42.37 23.68,42.37 34.29,31.75 34.58,31.47 34.62,31.42 IC7.22
N$17
  Top 0.305: IC1.7 22.86,43.83 35.19,31.5 35.4,31.5 35.62,31.28 IC7.20
N$18  (via drill 0.35)
  Top 0.305: v24.13,46.99 24.13,43.41 35.68,31.87 36.08,31.47 36.12,31.42 IC7.19 | v15.24,46.99 IC1.4
  Bottom 0.305: v24.13,46.99 v15.24,46.99
N$19
  Top 0.305: IC2.3 36.83,33.02 37.12,32.73 IC7.17
N$20
  Top 0.305: N1.LHDP 10.56,86.76 R24.2
N$21
  Top 0.305: R1.2 104.14,66.04 105.41,67.31 T1.B
N$22
  Top 0.305: R25.2 8.42,86.04 12.38,86.04 13.33,85.09 15.87,85.09 16.51,85.72 16.83,85.72 18.35,85.72 N1.RHDP
N$23
  Top 0.305: R20.1 60.64,104.77 72.71,104.77 R22.E
N$24
  Top 0.305: R2.2 55.88,64.03 55.88,66.99 55.56,67.31 T2.B
N$25
  Top 0.305: IC2.2 33.33,50.5 33.33,58.21 33.34,58.22 33.34,60.62 32.6,61.35 32.6,81.4 N2.9
N$26
  Bottom 0.305: N2.8 30.48,75.98 30.48,50.8 IC2.1
N$27
  Bottom 0.305: N2.7 39.24,76.65 39.37,76.52 39.37,68.26 46.99,60.64 IC2.10
N$28
  Bottom 0.305: N2.6 37.89,67.31 44.45,60.75 IC2.11
N$29
  Top 0.305: N2.5 40.85,66.25 36.83,62.23 IC2.14
N$30
  Top 0.305: N2.4 44.45,75.67 44.45,64.77 39.37,59.69 IC2.13
N$31
  Top 0.305: N2.3 45.16,61.52 IC2.9
N$32
  Top 0.305: IC2.8 50.8,50.8 50.8,78.74 47.51,82.03 N2.2
N$33
  Top 0.305: N2.1 36.51,76.84 36.51,68.9 34.29,66.67 IC2.15
N$34
  Top 0.305: T4.C L1.1 15.56,99.06 D3.A
N$35
  Top 0.305: R10.2 93.99,88.75 N4.A
N$36
  Top 0.305: N3.9 58.42,75.47 58.42,50.8 IC3.2
N$37
  Bottom 0.305: N3.8 60.96,74.71 60.96,53.34 IC3.1
N$38
  Bottom 0.305: IC3.10 72.39,66.04 71.12,67.31 71.12,76.2 70.67,76.65 N3.7
N$39
  Bottom 0.305: N3.6 69.64,66.25 69.85,66.04 IC3.11
N$40
  Top 0.305: N3.5 62.23,64.9 IC3.14
N$41
  Top 0.305: N3.4 75.22,67.6 IC3.13
N$42
  Top 0.305: N3.3 76.91,59.13 IC3.9
N$43
  Top 0.305: N3.2 77.47,82.03 78.74,80.76 78.74,53.34 IC3.8
N$44
  Top 0.305: N3.1 72.73,84.8 59.69,71.75 IC3.15
N$45
  Top 0.305: N3.A 72.4,88.75 R9.2
N$46
  Top 0.305: IC4.15 83.82,73.98 89.85,80.01 93.02,80.01 N4.1
N$47
  Top 0.305: N4.2 101.6,79.28 101.6,50.8 100.33,49.53 IC4.8
N$48
  Top 0.305: IC4.9 100.33,58.42 100.33,78.74 99.98,79.08 N4.3
N$49
  Top 0.305: IC4.13 95.25,63.5 95.25,74.93 96.81,76.49 N4.4
N$50
  Top 0.305: IC4.14 86.36,58.42 94.19,66.25 N4.5
N$51
  Bottom 0.305: N4.6 91.23,62.44 93.98,59.69 IC4.11
N$52
  Bottom 0.305: IC4.10 96.52,59.69 92.71,63.5 92.71,76.2 92.26,76.65 N4.7
N$53
  Bottom 0.305: IC4.1 80.01,50.8 80.01,72.17 N4.8
N$54
  Top 0.305: N4.9 82.85,78.32 82.85,59.56 82.55,59.26 82.55,52.07 83.82,50.8 IC4.2
N$55
  Top 0.305: R8.2 40.65,88.75 N2.A
N$56
  Top 0.305: N1.A 17.79,88.75 R7.2
N$57
  Top 0.305: IC7.16 37.62,40.16 44.45,46.99 IC2.6
N$58
  Top 0.305: IC5.2 114.3,50.8 113.03,52.07 113.03,78.01 N5.9
N$59
  Bottom 0.305: N5.8 110.49,72.17 110.49,52.07 111.76,50.8 IC5.1
N$60
  Bottom 0.305: N5.7 122.74,76.65 123.19,76.2 123.19,62.23 127,58.42 IC5.10
N$61
  Bottom 0.305: N5.6 121.71,62.44 124.46,59.69 IC5.11
N$62
  Top 0.305: N5.5 124.67,64.98 IC5.14
N$63
  Top 0.305: IC5.13 128.27,66.04 128.27,75.67 N5.4
N$64
  Top 0.305: N5.3 129.54,78.52 IC5.9
N$65
  Top 0.305: N5.2 130.81,80.55 130.81,52.07 129.54,50.8 IC5.8
N$66
  Top 0.305: IC5.15 114.3,73.66 125.44,84.8 N5.1
N$67
  Top 0.305: IC7.14 38.62,38.62 46.99,46.99 IC2.7
N$68
  Top 0.305: IC6.15 138.43,76.2 147.03,84.8 N6.1
N$69
  Top 0.305: N6.2 154.94,78.01 154.94,50.8 IC6.8
N$70
  Top 0.305: N6.3 153.67,75.98 IC6.9
N$71
  Top 0.305: N6.4 148.89,62.53 IC6.13
N$72
  Top 0.305: N6.5 146.26,62.44 IC6.14
N$73
  Bottom 0.305: N6.6 143.3,62.44 IC6.11
N$74
  Bottom 0.305: IC6.10 144.78,63.5 144.78,76.2 144.33,76.65 N6.7
N$75
  Bottom 0.305: N6.8 134.62,74.71 134.62,52.07 135.89,50.8 IC6.1
N$76
  Top 0.305: N6.9 137.16,80.55 137.16,52.07 138.43,50.8 IC6.2
N$77
  Top 0.305: IC11.1 149.26,31.47 149.54,31.75 151.77,31.75 152.4,31.11 R15.1
N$78
  Top 0.305: IC11.24 137.04,30.46 R16.2
N$79
  Top 0.305: N11.11 158.43,81.04 158.43,73.02 162.56,68.9 IC8.15
N$80
  Bottom 0.305: N11.10 164.38,80.24 164.38,74.7 179.07,60.01 179.07,52.07 177.8,50.8 IC8.8
N$81
  Bottom 0.305: IC8.9 177.8,59.05 177.48,59.37 176.21,59.37 163.2,72.39 163.2,79.43 162.11,80.52 159.74,80.52 N11.12
N$82
  Bottom 0.305: N11.14 161.92,65.41 167.64,59.69 IC8.13
N$83
  Top 0.305: N11.2 165.1,77.03 IC8.14
N$84
  Top 0.305: N11.4 170.18,78.02 170.18,60.96 172.72,58.42 IC8.11
N$85
  Top 0.305: N11.5 171.45,78.66 171.45,62.23 175.26,58.42 IC8.10
N$86
  Top 0.305: N11.6 163.83,80.53 163.83,53.34 161.29,53.34 160.02,52.07 IC8.1
N$87
  Top 0.305: IC7.12 39.62,37.08 48.26,45.72 58.42,45.72 IC3.3
N$88
  Top 0.305: IC7.11 40.12,36.31 48.26,44.45 52.07,44.45 53.34,43.18 68.58,43.18 69.85,44.45 IC3.6
N$89  (via drill 0.35)
  Top 0.305: IC7.13 39.12,37.85 v40.64,39.37 | v39.05,47.31 39.05,49.21 IC2.4
  Bottom 0.305: v40.64,39.37 40.64,45.72 v39.05,47.31
N$90
  Top 0.305: IC3.7 72.39,43.18 71.12,41.91 46.37,41.91 40.64,36.18 40.64,31.76 41.12,31.28 IC7.9
N$91  (via drill 0.35)
  Top 0.305: v64.77,45.72 IC3.4 | IC7.8 41.62,31.74 v41.44,31.93
  Bottom 0.305: v41.44,31.93 55.23,45.72 v64.77,45.72
N$92
  Top 0.305: IC5.3 116.84,44.45 119.7,41.59 127.93,41.59 136.08,33.44 137.06,33.44 138.26,32.24 IC11.23
N$93
  Top 0.305: IC4.4 88.9,43.18 85.09,39.37 52.71,39.37 44.77,31.43 44.66,31.32 44.62,31.28 IC7.2
N$94  (via drill 0.35)
  Top 0.305: v88.22,46.99 88.22,44.22 83.82,39.83 52.52,39.83 44.12,31.42 IC7.3
  Bottom 0.305: v88.22,46.99 95.25,46.99 96.52,48.26 IC4.7
N$95  (via drill 0.35)
  Top 0.305: v52.07,40.41 51.13,40.41 43.12,32.4 IC7.5
  Bottom 0.305: v52.07,40.41 79.78,40.41 85.09,45.72 85.09,46.99 86,47.9 91.84,47.9 93.46,49.53 IC4.6
N$96
  Top 0.305: IC4.3 86.36,43.18 84.28,41.1 51.17,41.1 42.62,32.55 IC7.6
N$97
  Top 0.305: IC11.22 138.76,32.69 124.46,46.99 IC5.6
N$98
  Top 0.305: IC5.7 127,46.99 139.76,34.23 IC11.20
N$99  (via drill 0.35)
  Top 0.305: v136.36,34.12 128.27,42.22 121.37,42.22 119.38,44.21 IC5.4 | v140.58,33.66 140.26,33.34 IC11.19
  Bottom 0.305: v136.36,34.12 140.11,34.12 v140.58,33.66
N$100
  Top 0.305: IC11.17 141.26,34 139.7,35.56 139.7,48.26 IC6.3
N$101  (via drill 0.35)
  Top 0.305: IC11.16 141.76,34.77 v140.97,35.56
  Bottom 0.305: v140.97,35.56 148.59,43.18 IC6.6
N$102  (via drill 0.35)
  Top 0.305: IC11.14 142.76,35.04 v142.24,35.56
  Bottom 0.305: v142.24,35.56 151.13,44.45 IC6.7
N$103
  Top 0.305: R19.1 64.13,103.19 R21.E
N$104
  Top 0.305: R26.2 30.71,86.76 N2.LHDP
N$105
  Top 0.305: IC11.13 143.26,49.28 IC6.4
N$106
  Top 0.305: IC8.3 151.13,35.56 147.32,35.56 143.76,32 IC11.12
N$107  (via drill 0.35)
  Top 0.305: IC11.11 144.26,31.28 147.27,34.29 v149.86,34.29
  Bottom 0.305: v149.86,34.29 163.83,34.29 172.72,43.18 IC8.6
N$108  (via drill 0.35)
  Top 0.305: IC11.9 145.26,31.61 146.67,33.02 v149.86,33.02
  Bottom 0.305: v149.86,33.02 163.83,33.02 175.26,44.45 IC8.7
N$109
  Top 0.305: IC8.4 150.45,32.34 146.82,32.34 145.76,31.28 IC11.8
N$110
  Top 0.305: R27.2 51.03,86.76 N2.RHDP
N$111
  Top 0.305: R28.2 68.16,86.84 N3.LHDP
N$112
  Top 0.305: R29.2 79.54,85.41 78.74,85.41 77.39,86.76 N3.RHDP
N$113
  Top 0.305: B1.+ 83.55,33.34 96.52,33.34 96.52,31.75 98.11,30.16 IC13.14
N$114  (via drill 0.35)
  Top 0.305: v88.58,92.59 89.97,93.98 R30.2
  Bottom 0.305: v88.58,92.59 88.58,91.44 v89.53,90.49 89.83,90.19 N4.LHDP
N$115
  Top 0.305: R31.2 103.9,86.76 N4.RHDP
N$116
  Top 0.305: R32.2 113.9,86.76 N5.LHDP
N$117
  Top 0.305: R33.2 133.43,86.76 N5.RHDP
N$118
  Top 0.305: R35.2 155.02,86.76 N6.RHDP
N$119  (via drill 0.35)
  Top 0.305: R34.2 143.83,93.18 v143.83,93.03
  Bottom 0.305: v143.83,93.03 141.9,91.1 N6.LHDP
N$120
  Top 0.305: T5.B R36.1
N$122
  Top 0.305: IC7.24 30.88,30.46 R4.2
N$123
  Top 0.305: IC7.1 47.86,30.46 R14.1
N$124
  Top 0.305: N7.A 109.22,81.6 R37.1
N$126
  Top 0.305: N10.A 176.53,81.6 R40.1
N$128
  Top 0.305: N8.A 57.47,81.91 R39.1
N$136
  Top 0.305: ATXMEGA32A4U.36 83.33,15.1 79.71,18.71 Q2.1 79.1,19.05 C16.1
N$138
  Top 0.305: ATXMEGA32A4U.37 Q2.3 | Q2.3 | C14.1 77.7,13.97 78.62,13.05 80.61,13.05 Q2.3
N$139
  Top 0.305: T3.B 180.34,68.58 181.61,67.31 R18.2
N$140
  Top 0.305: T3.C 174.31,73.34 N10.K
N$142
  Top 0.305: R22.S 72.92,96.73 57.96,96.73 56.9,97.79 R19.2 IC12.7
N$144  (via drill 0.35)
  Top 0.305: R21.S 66.73,100.65 v63.5,97.42 | v55.24,96.52 IC12.6 52.84,96.52 51.99,97.36 51.99,97.56 v51.77,97.79 | C36.1 44.77,97.79 IC12.2 v50.12,97.79
  Bottom 0.305: v63.5,97.42 56.14,97.42 v55.24,96.52 | v51.77,97.79 v50.12,97.79
N$145  (via drill 0.35)
  Top 0.305: T4.B R23.2 18.63,95.99 18.63,96.13 19.02,96.52 v26.67,96.52 | v36.83,101.6 40.11,98.32 R17.1
  Bottom 0.305: v26.67,96.52 31.75,101.6 v36.83,101.6
N$147
  Top 0.305: C34.2 IC12.5
NIXIEAM/PM  (via drill 0.35)
  Top 0.305: R18.1 181.61,58.42 175.26,52.07 v162.56,52.07 | IC10.2 120.02,29.84 120.65,30.48 v120.65,38.1
  Bottom 0.305: v120.65,38.1 132.08,38.1 142.24,48.26 142.24,50.8 143.51,52.07 v162.56,52.07
NIXIECOLON1
  Top 0.305: R1.1 104.14,53.34 110.33,47.15 112.87,47.15 114.46,45.56 121.92,38.1 121.92,30.48 122.55,29.84 IC10.15
NIXIECOLON2  (via drill 0.35)
  Top 0.305: v83.5,42.86 v73.34,42.86 | v70.48,42.59 52.61,42.59 v51.44,43.77 | v51.75,46.62 53.34,48.21 R2.1 | IC10.1 117.58,41.49 114.62,44.45 94.93,44.45 92.08,41.59 v88.58,41.59
  Bottom 0.305: v73.34,42.86 70.75,42.86 v70.48,42.59 | v51.44,43.77 51.44,46.31 v51.75,46.62 | v88.58,41.59 87.31,42.86 v83.5,42.86
NIXIEDP  (via drill 0.35)
  Top 0.305: R25.1 R24.1 10.31,89.85 v23.81,89.85 | v28.89,90.49 29.36,90.49 R26.1 30.96,89.85 v45.08,89.85 | R27.1 51.27,89.53 v53.02,89.53 v55.24,89.53 | v60.01,89.53 60.16,89.69 R28.1 78.58,89.69 v78.74,89.85 | R30.1 85.89,92.71 v85.41,92.71 | R29.1 81.43,86.36 v83.19,86.36 85.09,88.27 91.12,88.27 93.34,90.49 v99.06,90.49 | T5.C v85.41,97.16 | R35.1 156.38,88.58 v158.43,88.58 | v158.43,93.34 155.26,96.52 141.14,96.52 139.55,94.93 R34.1 135.57,94.61 v134.62,93.66 | v134.62,90.17 R33.1 | R32.1 114.15,89.85 115.89,89.85 | 115.89,89.85 v129.54,89.85 | v106.36,88.9 106.21,89.05 R31.1 104.46,90.17 v104.14,90.49 | v115.57,88.9 115.89,89.22 115.89,89.85
  Bottom 0.305: v28.89,90.49 24.45,90.49 v23.81,89.85 | v45.08,89.85 52.7,89.85 v53.02,89.53 | v55.24,89.53 v60.01,89.53 | v85.41,97.16 v85.41,92.71 83.19,90.49 v83.19,86.36 82.23,86.36 v78.74,89.85 | v158.43,88.58 v158.43,93.34 | v134.62,93.66 v134.62,90.17 134.3,89.85 v129.54,89.85 | v106.36,88.9 v115.57,88.9 | v104.14,90.49 v99.06,90.49
PDICLK
  Top 0.305: J1.5 86.36,29.21 86.36,16.51 86.97,15.9 ATXMEGA32A4U.35
PDIDATA
  Top 0.305: J1.1 92.71,30.48 88.55,30.48 87.63,29.56 87.63,17.25 ATXMEGA32A4U.34
PWM
  Top 0.305: R17.2 42.12,96.52 IC12.3
SCL  (via drill 0.35)
  Top 0.305: ATXMEGA32A4U.29 93.18,20.38 v93.34,20.54 | v99.7,26.67 99.7,27.3 100.01,27.62 IC13.16 102.23,27.62 103.51,26.35 112.71,26.35 116.2,29.84 116.2,32.38 113.58,35.01 U1.SCL | R5.2 99.7,20.64 v97.79,22.54
  Bottom 0.305: v93.34,20.54 95.48,20.54 96.69,21.74 96.69,22.54 | v99.7,26.67 96.69,23.66 96.69,22.54 | v97.79,22.54 96.69,22.54
SDA  (via drill 0.35)
  Top 0.305: ATXMEGA32A4U.28 93.98,19.64 v94.1,19.81 | U1.SDA 116.28,34.05 v115.89,33.66 | v113.98,33.34 112.68,32.04 109.1,32.04 105.96,28.89 IC13.15 100.16,28.89 v99.57,28.3 | R6.2 v99.7,23.18
  Bottom 0.305: v94.1,19.81 94.55,20.08 96.6,20.08 v99.7,23.18 100.38,23.86 100.38,26.95 99.57,27.76 v99.57,28.3 | v115.89,33.66 114.31,33.66 v113.98,33.34
VCC  (via drill 0.35)
  Top 0.305: IC8.5 C10.1 v164.78,45.4 | C9.1 IC6.5 | C8.1 IC5.5 | IC1.5 C7.1 17.46,45.72 v14.61,45.72 | C6.1 IC4.5 | IC3.5 C5.1 | IC7.7 42.12,34.5 C21.1 41.32,33.7 v41.32,33.66 | IC7.18 36.62,31.57 35.56,32.63 C23.1 33.97,34.61 v33.66,34.93 | MINIUSB.1 33.33,11.44 20.64,24.13 D2.A 17.82,22.9 11.79,22.9 C1.1 9.21,22.86 | 4.13,45.72 4.13,95.88 C30.1 4.44,96.84 L1.2 10.48,106.05 44.45,106.05 51.44,99.06 | 4.13,45.72 4.13,36.51 U2.3 2.86,35.56 1.59,34.29 1.59,26.35 IC9.3 9.21,22.86 | R20.2 C35.1 55.56,99.06 IC12.8 51.44,99.06 | IC12.4 49.53,95.25 50.8,96.52 50.8,98.42 51.44,99.06 | IC11.18 140.76,28.15 v140.97,27.94 144.46,27.94 v144.78,27.62 146.26,29.1 IC11.7 | v38.1,46.99 C4.1 41.91,49.21 IC2.5 41.91,48.9 v43.5,47.31 | C9.1 144.78,44.13 v144.78,34.93 | v11.43,45.72 4.13,45.72 | v159.39,45.4 C9.1 | C9.1 v144.47,45.4 v144.46,45.4 | v139.02,43.82 131.45,43.82 v129.86,45.4 | v123.83,45.4 C8.1 | C8.1 v120.06,45.4 | v112.71,45.4 C6.1 | C6.1 v89.85,45.4 | v85.41,45.08 74.3,45.08 v73.34,46.04 | v68.9,46.36 67.62,46.36 C5.1 | C5.1 v65.72,46.67 | 9.21,22.86 9.84,23.49 C32.+ | v136.53,31.11 135.89,31.75 C25.2
  Bottom 0.305: v136.53,31.11 139.7,27.94 v140.97,27.94 | v33.66,34.93 29.85,34.93 D2.A | v33.66,34.93 40.05,34.93 v41.32,33.66 | v144.78,34.93 v144.78,27.62 | v14.61,45.72 v11.43,45.72 | v164.78,45.4 v159.39,45.4 | v144.46,45.4 140.6,45.4 v139.02,43.82 | v129.86,45.4 v123.83,45.4 | v120.06,45.4 v112.71,45.4 | v89.85,45.4 85.74,45.4 v85.41,45.08 | v73.34,46.04 69.21,46.04 v68.9,46.36 | v65.72,46.67 65.09,47.31 v43.5,47.31 | v38.1,46.99 34.29,46.99 33.66,46.36 v33.66,34.93

## Text on the board
Document: HIGH VOLTAGE SECTION | Nixie Tube Clock | Matthew Whiteley | V1.2 | 16/07/2019